# Altium PCB PCB.PcbDoc (part 1 of 2)
Units mil, origin at the board's own origin, x right, y up, seen from the top; angles counter-clockwise.
Board outline 3935 x 3935 mil, 2 copper layers (Top Layer, Bottom Layer); 188 components, 185 nets, 566 pads, 164 vias.
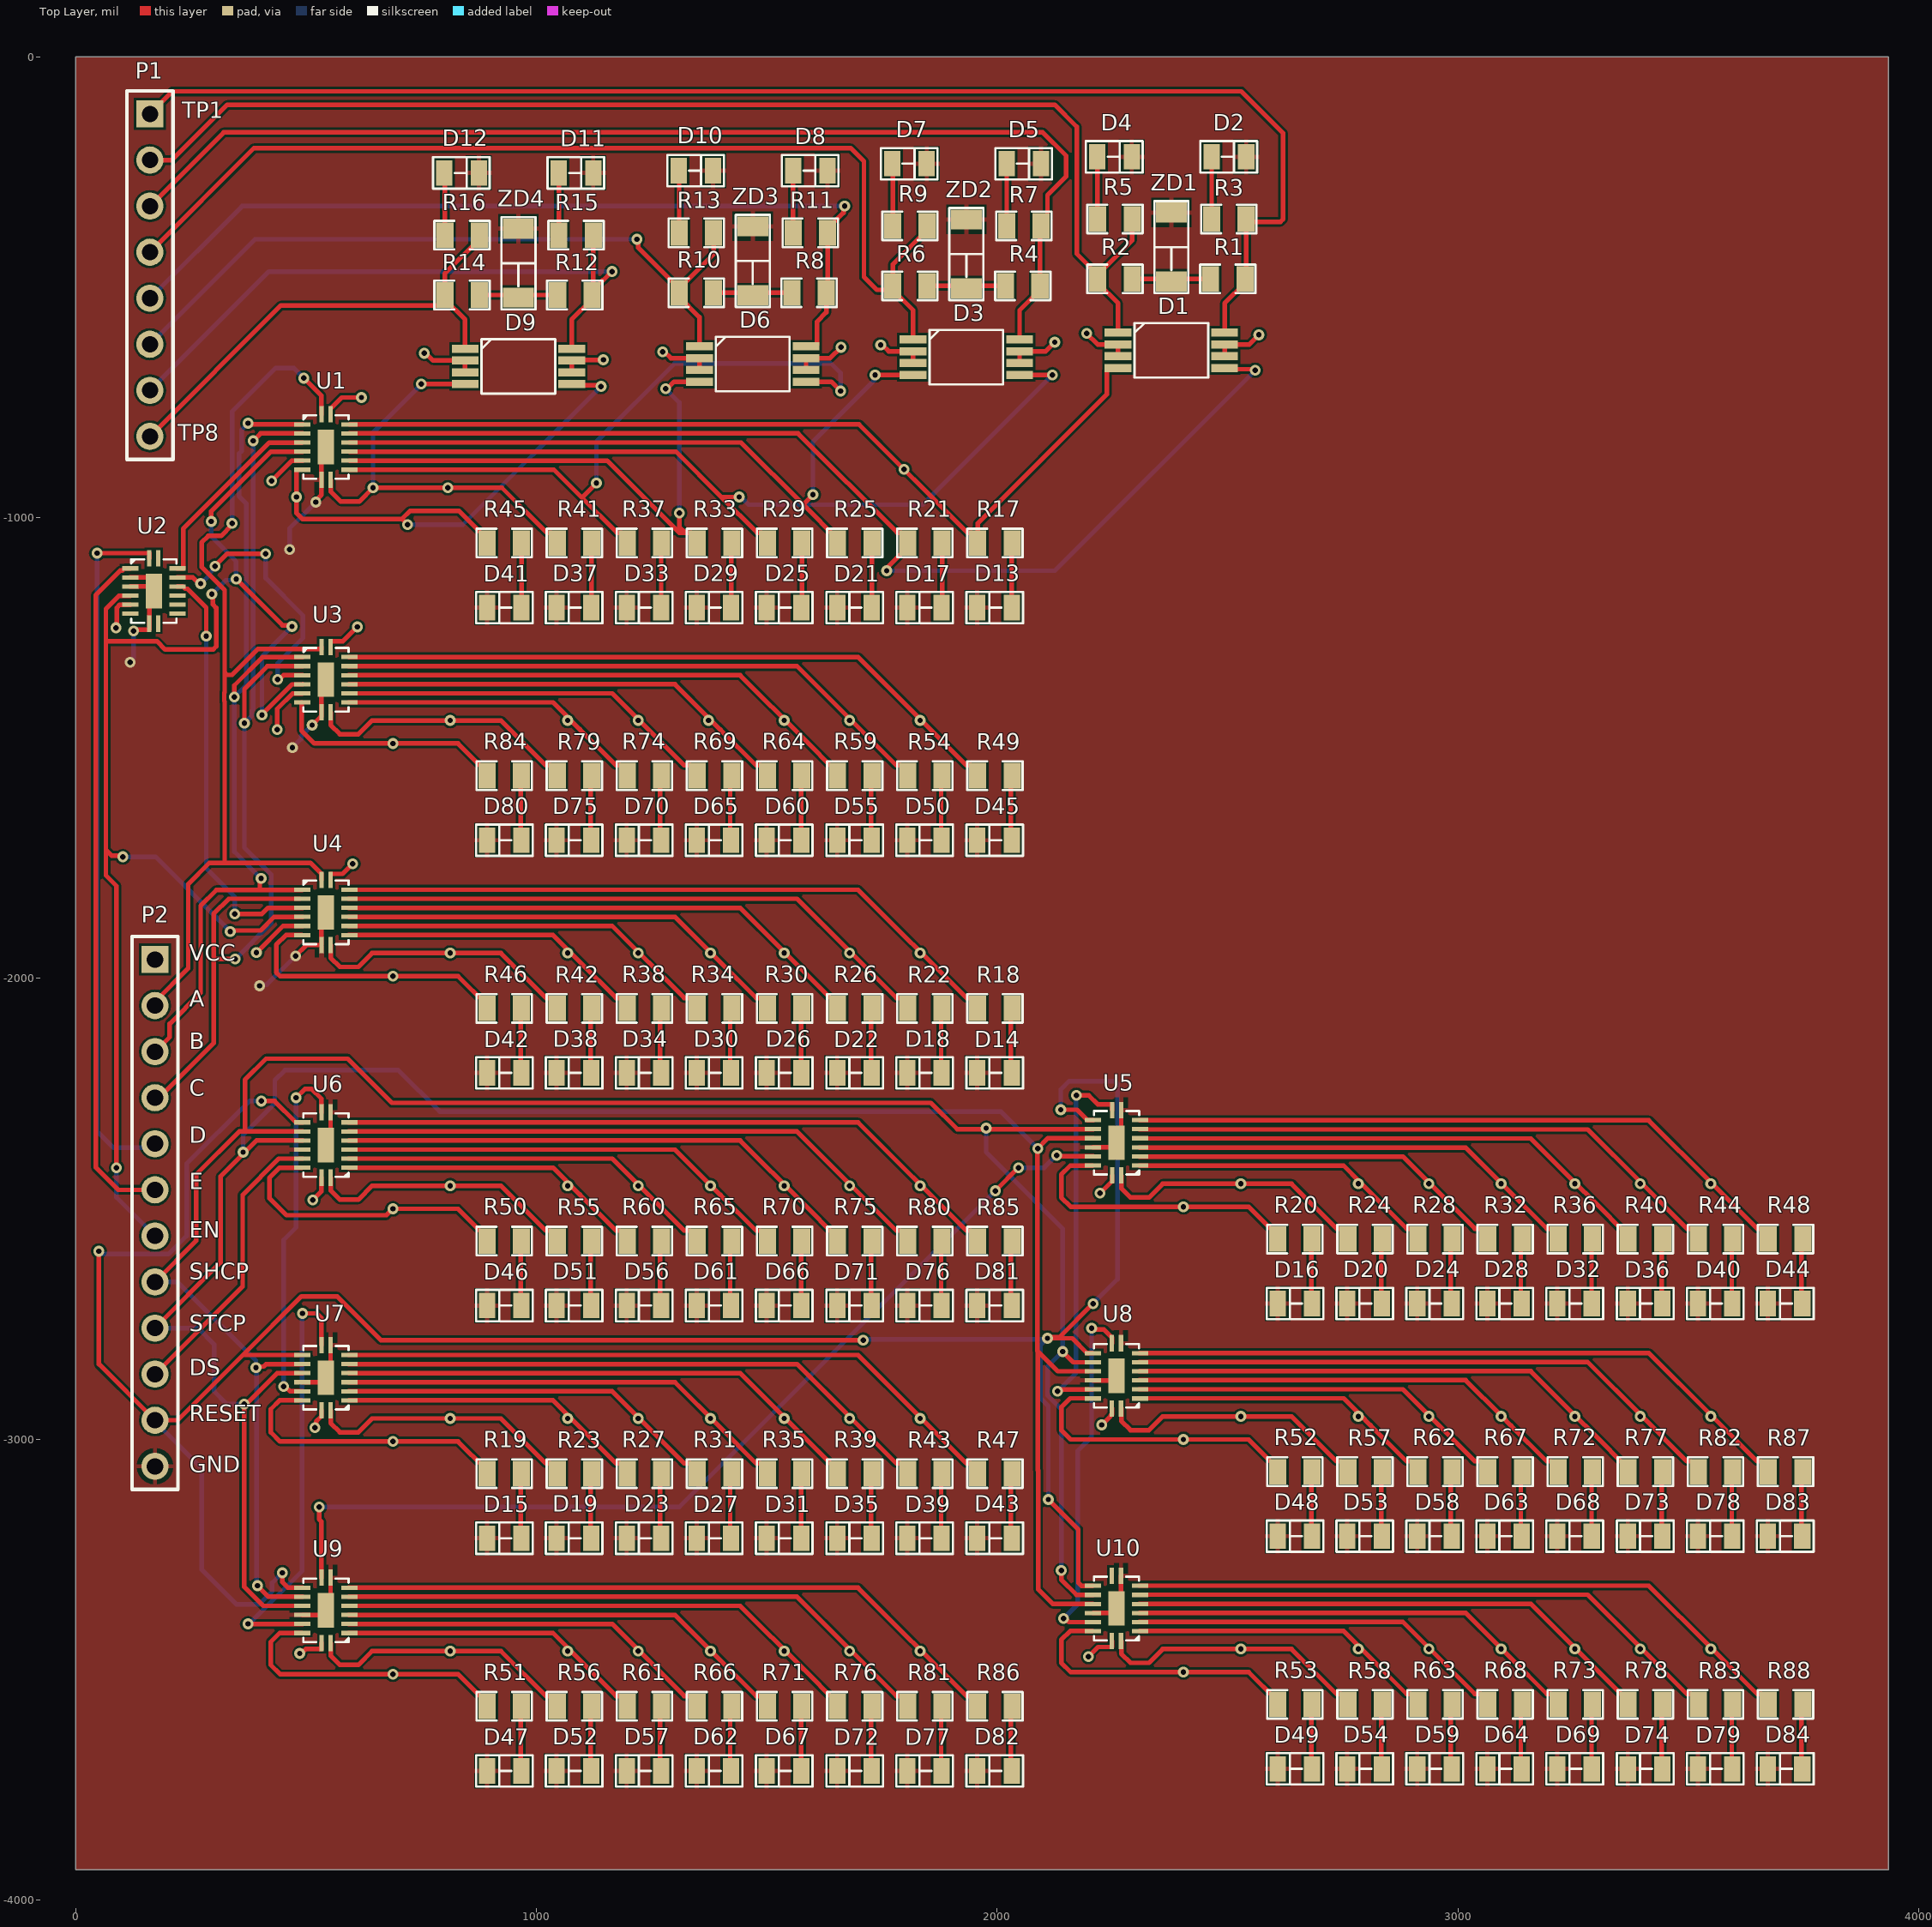
[diagram p0: Top Layer view]
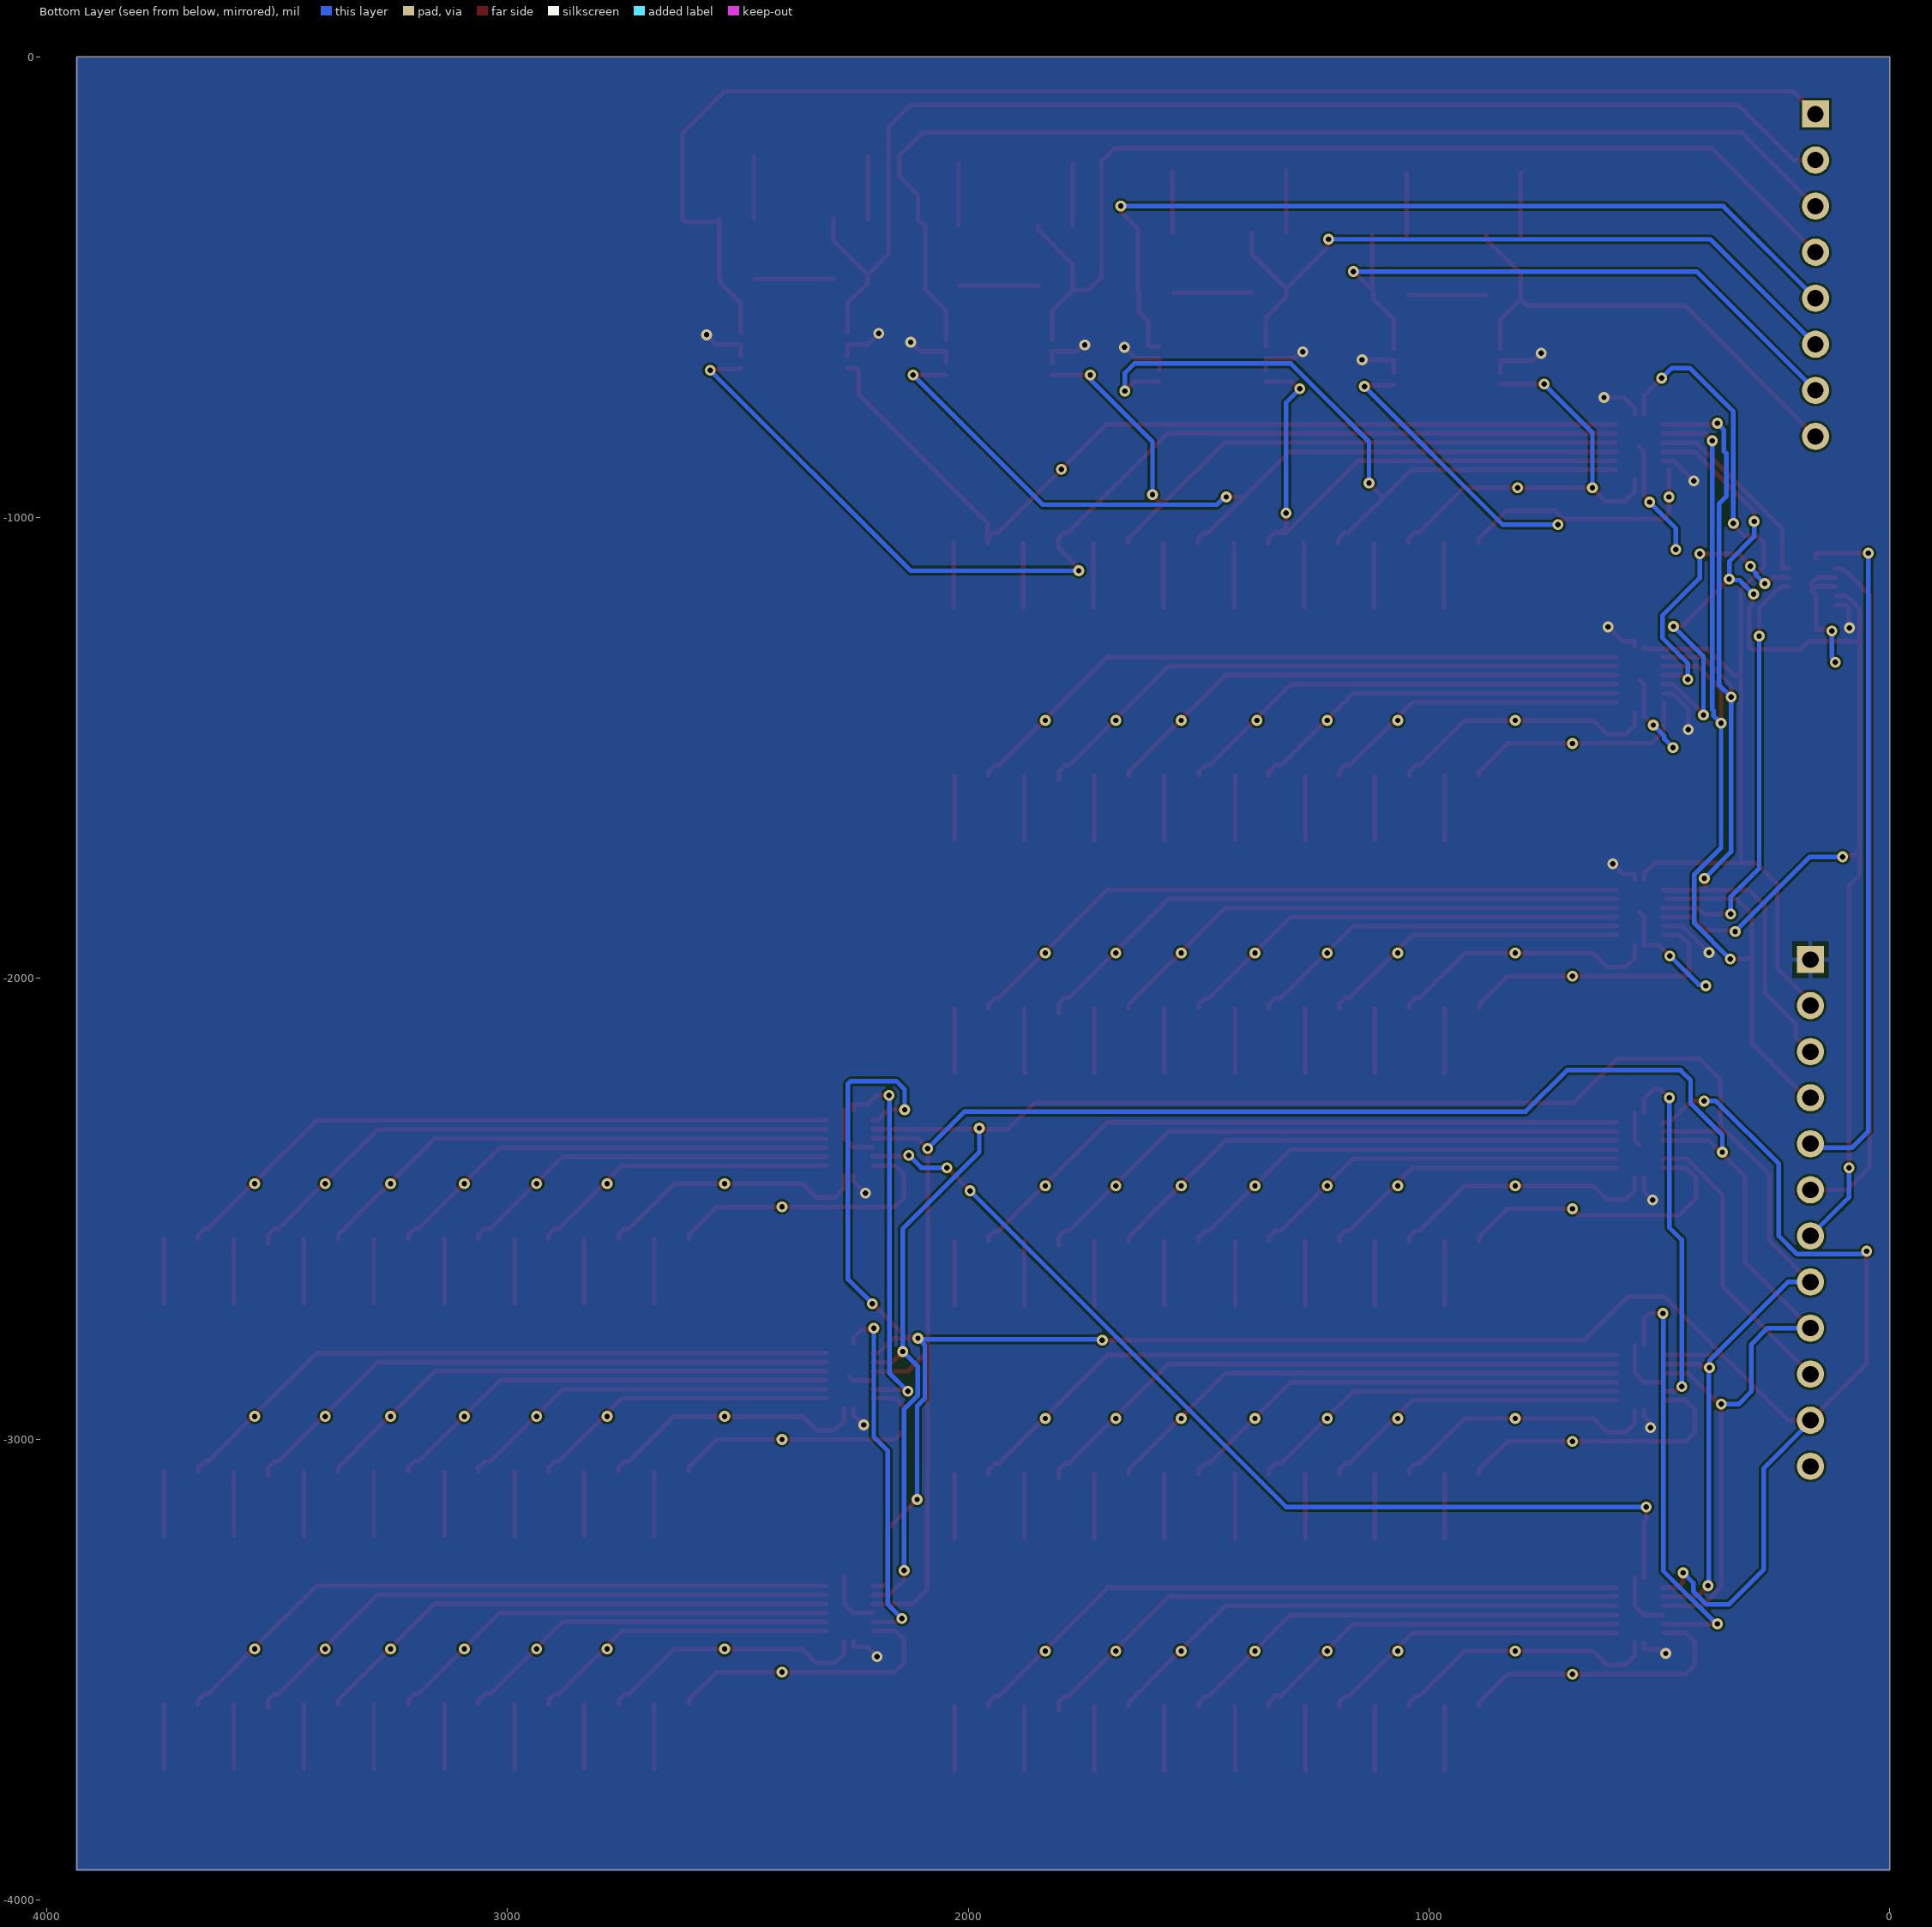
[diagram p1: Bottom Layer view, seen from below]
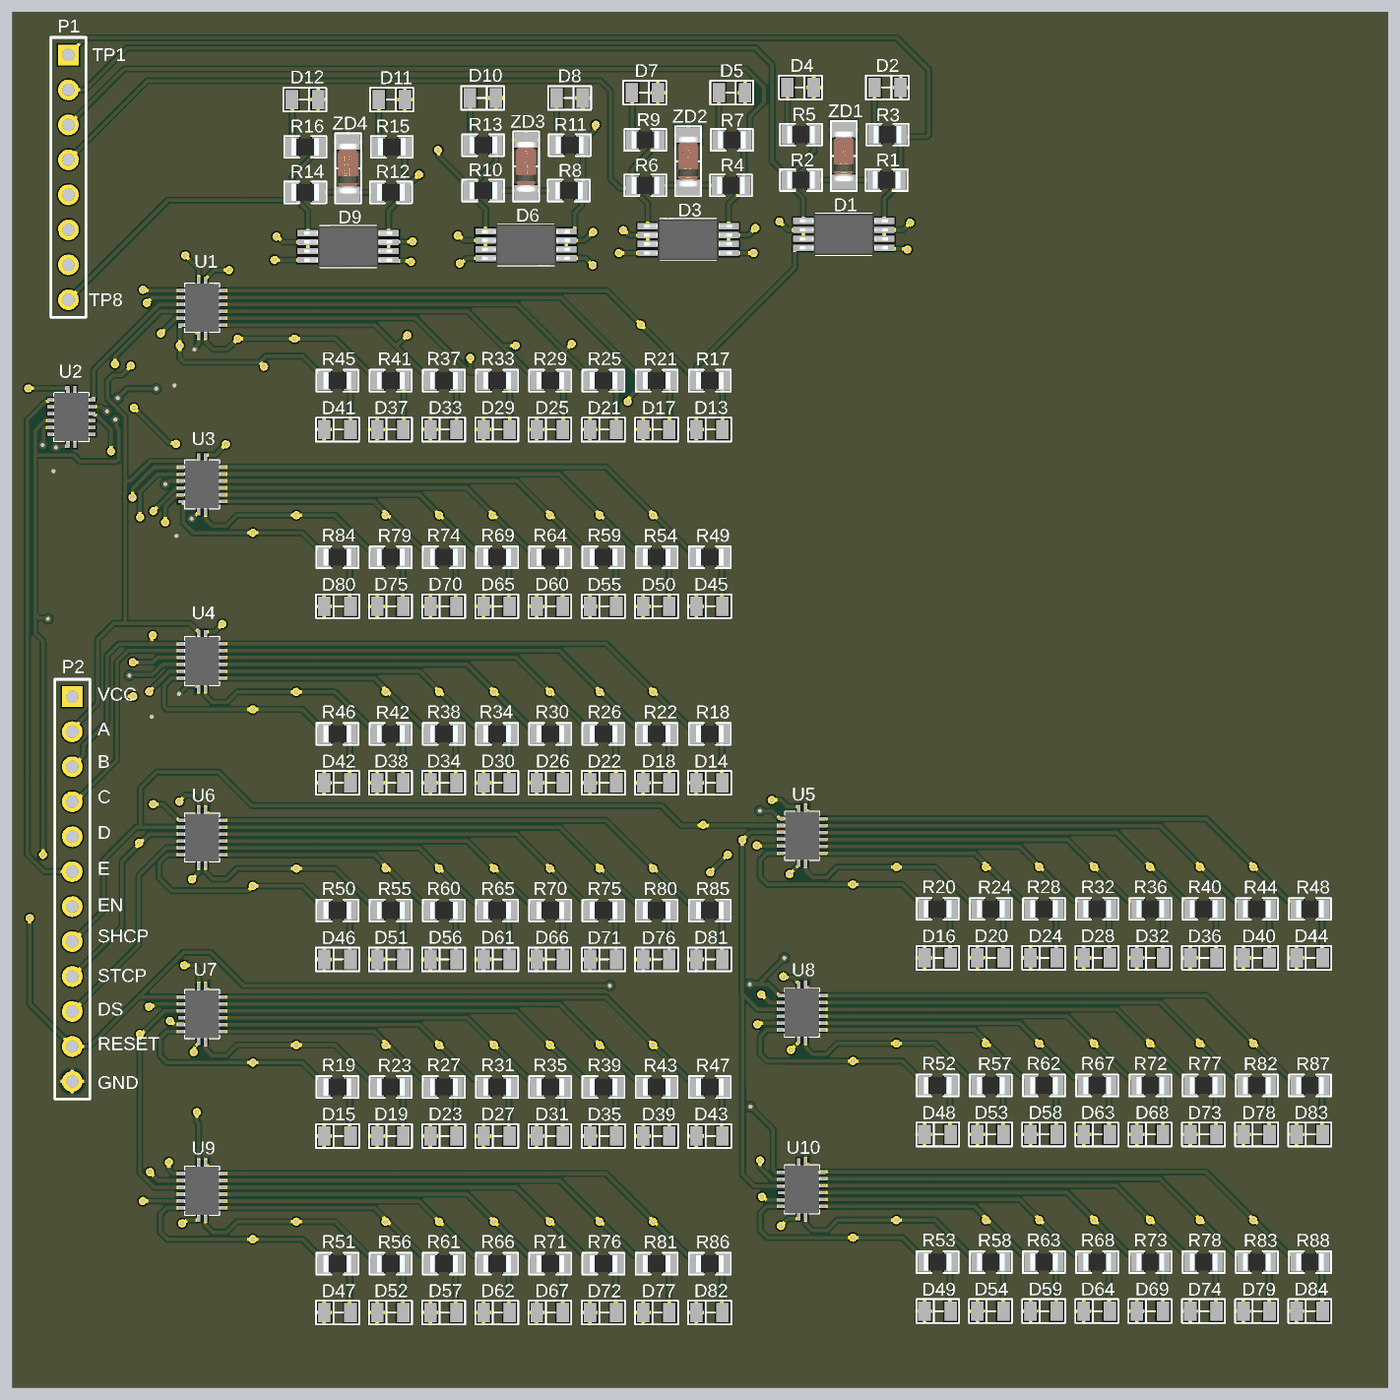
[diagram p3: 3D render of the assembled board from above, using the file's embedded part models]

## Layer stack, top to bottom
Top Solder: solder mask 0.4, Solder Resist, Dk 3.5
Top Layer: signal copper 1.4
Dielectric 1: dielectric 12.6, FR-4, Dk 4.8
Bottom Layer: signal copper 1.4
Bottom Solder: solder mask 0.4, Solder Resist, Dk 3.5

## Board outline
0,-3935 0,0 3935,0 3935,-3935

## Design rules (kind name [scope] priority, off if disabled: settings)
Clearance [All] p1: gap=5 ignorepadtopadclearanceinfootprint=FALSE
MinimumSolderMaskSliver [All] p1: minsoldermaskwidth=0
PolygonConnect [All] p1: thpad.connectstyle=Relief thpad.reliefconductorwidth=10 thpad.reliefentries=4 thpad.polygonreliefangle="90 Angle" thpad.airgapwidth=10 smdpad.connectstyle=Relief smdpad.reliefconductorwidth=10 smdpad.reliefentries=4 smdpad.polygonreliefangle="90 Angle" smdpad.airgapwidth=10 via.connectstyle=Direct via.reliefconductorwidth=10 via.reliefentries=4 via.polygonreliefangle="90 Angle" via.airgapwidth=10
RoutingVias [All] p1: holewidth=11.81 width=23.62 viastyle="Through Hole" minholewidth=1 minwidth=1 maxholewidth=28 maxwidth=50
SilkToSolderMaskClearance [IsPad] p1: minsilkscreentomaskgap=0 clearancetoexposedcopper=TRUE
SolderMaskExpansion [All] p1: expansion=4
Width [All] p1: maxlimit=10 minlimit=10 preferedwidth=10
28 further rules are at their usual default settings.

## Components (designator, comment, footprint, x,y, rotation, side; value= is the part's Value field where it differs from the comment)
D1 "SI6913DQ" "Dual Mosfet" 2377.99,-636.61 r0 top
D2 "0805 LED" "0805 LED" 2502.99,-216.61 r0 top
D3 "SI6913DQ" "Dual Mosfet" 1932.99,-651.61 r0 top
D4 "0805 LED" "0805 LED" 2254.59,-216.61 r0 top
D5 "0805 LED" "0805 LED" 2057.99,-231.61 r0 top
D6 "SI6913DQ" "Dual Mosfet" 1469.33,-666.61 r0 top
D7 "0805 LED" "0805 LED" 1809.59,-231.61 r0 top
D8 "0805 LED" "0805 LED" 1594.33,-246.61 r0 top
D9 "SI6913DQ" "Dual Mosfet" 960.67,-671.61 r0 top
D10 "0805 LED" "0805 LED" 1345.93,-246.61 r0 top
D11 "0805 LED" "0805 LED" 1085.67,-251.61 r0 top
D12 "0805 LED" "0805 LED" 837.27,-251.61 r0 top
D13 "0805 LED" "0805 LED" 1994,-1195 r180 top
D14 "0805 LED" "0805 LED" 1994,-2205 r180 top
D15 "0805 LED" "0805 LED" 930,-3215 r180 top
D16 "0805 LED" "0805 LED" 2646.18,-2705.57 r180 top
D17 "0805 LED" "0805 LED" 1842,-1195 r180 top
D18 "0805 LED" "0805 LED" 1842,-2205 r180 top
D19 "0805 LED" "0805 LED" 1081,-3215 r180 top
D20 "0805 LED" "0805 LED" 2797.18,-2705.57 r180 top
D21 "0805 LED" "0805 LED" 1690,-1195 r180 top
D22 "0805 LED" "0805 LED" 1690,-2205 r180 top
D23 "0805 LED" "0805 LED" 1233,-3215 r180 top
D24 "0805 LED" "0805 LED" 2949.18,-2705.57 r180 top
D25 "0805 LED" "0805 LED" 1537,-1195 r180 top
D26 "0805 LED" "0805 LED" 1537,-2205 r180 top
D27 "0805 LED" "0805 LED" 1385,-3215 r180 top
D28 "0805 LED" "0805 LED" 3101.18,-2705.57 r180 top
D29 "0805 LED" "0805 LED" 1385,-1195 r180 top
D30 "0805 LED" "0805 LED" 1385,-2205 r180 top
D31 "0805 LED" "0805 LED" 1537,-3215 r180 top
D32 "0805 LED" "0805 LED" 3253.18,-2705.57 r180 top
D33 "0805 LED" "0805 LED" 1233,-1195 r180 top
D34 "0805 LED" "0805 LED" 1233,-2205 r180 top
D35 "0805 LED" "0805 LED" 1690,-3215 r180 top
D36 "0805 LED" "0805 LED" 3406.18,-2705.57 r180 top
D37 "0805 LED" "0805 LED" 1081,-1195 r180 top
D38 "0805 LED" "0805 LED" 1081,-2205 r180 top
D39 "0805 LED" "0805 LED" 1842,-3215 r180 top
D40 "0805 LED" "0805 LED" 3558.18,-2705.57 r180 top
D41 "0805 LED" "0805 LED" 930,-1195 r180 top
D42 "0805 LED" "0805 LED" 930,-2205 r180 top
D43 "0805 LED" "0805 LED" 1994,-3215 r180 top
D44 "0805 LED" "0805 LED" 3710.18,-2705.57 r180 top
D45 "0805 LED" "0805 LED" 1994,-1700 r180 top
D46 "0805 LED" "0805 LED" 930,-2710 r180 top
D47 "0805 LED" "0805 LED" 930,-3720 r180 top
D48 "0805 LED" "0805 LED" 2646.18,-3210.57 r180 top
D49 "0805 LED" "0805 LED" 2646.18,-3715.57 r180 top
D50 "0805 LED" "0805 LED" 1842,-1700 r180 top
D51 "0805 LED" "0805 LED" 1081,-2710 r180 top
D52 "0805 LED" "0805 LED" 1081,-3720 r180 top
D53 "0805 LED" "0805 LED" 2797.18,-3210.57 r180 top
D54 "0805 LED" "0805 LED" 2797.18,-3715.57 r180 top
D55 "0805 LED" "0805 LED" 1690,-1700 r180 top
D56 "0805 LED" "0805 LED" 1233,-2710 r180 top
D57 "0805 LED" "0805 LED" 1233,-3720 r180 top
D58 "0805 LED" "0805 LED" 2949.18,-3210.57 r180 top
D59 "0805 LED" "0805 LED" 2949.18,-3715.57 r180 top
D60 "0805 LED" "0805 LED" 1537,-1700 r180 top
D61 "0805 LED" "0805 LED" 1385,-2710 r180 top
D62 "0805 LED" "0805 LED" 1385,-3720 r180 top
D63 "0805 LED" "0805 LED" 3101.18,-3210.57 r180 top
D64 "0805 LED" "0805 LED" 3101.18,-3715.57 r180 top
D65 "0805 LED" "0805 LED" 1385,-1700 r180 top
D66 "0805 LED" "0805 LED" 1537,-2710 r180 top
D67 "0805 LED" "0805 LED" 1537,-3720 r180 top
D68 "0805 LED" "0805 LED" 3253.18,-3210.57 r180 top
D69 "0805 LED" "0805 LED" 3253.18,-3715.57 r180 top
D70 "0805 LED" "0805 LED" 1233,-1700 r180 top
D71 "0805 LED" "0805 LED" 1690,-2710 r180 top
D72 "0805 LED" "0805 LED" 1690,-3720 r180 top
D73 "0805 LED" "0805 LED" 3406.18,-3210.57 r180 top
D74 "0805 LED" "0805 LED" 3406.18,-3715.57 r180 top
D75 "0805 LED" "0805 LED" 1081,-1700 r180 top
D76 "0805 LED" "0805 LED" 1842,-2710 r180 top
D77 "0805 LED" "0805 LED" 1842,-3720 r180 top
D78 "0805 LED" "0805 LED" 3558.18,-3210.57 r180 top
D79 "0805 LED" "0805 LED" 3558.18,-3715.57 r180 top
D80 "0805 LED" "0805 LED" 930,-1700 r180 top
D81 "0805 LED" "0805 LED" 1994,-2710 r180 top
D82 "0805 LED" "0805 LED" 1994,-3720 r180 top
D83 "0805 LED" "0805 LED" 3710.18,-3210.57 r180 top
D84 "0805 LED" "0805 LED" 3710.18,-3715.57 r180 top
P1 "Outputs" HDR1X8 160.78,-123.57 r270 top
P2 "Header 12" HDR1X12 171.78,-1958.9 r270 top
R1 "100R" "0805 Resistor" 2500.39,-481.61 r180 top
R2 "100R" "0805 Resistor" 2255.59,-481.61 r0 top
R3 "330R" "0805 Resistor" 2502.99,-351.61 r0 top
R4 "100R" "0805 Resistor" 2055.39,-496.61 r180 top
R5 "330R" "0805 Resistor" 2255.59,-351.61 r0 top
R6 "100R" "0805 Resistor" 1810.59,-496.61 r0 top
R7 "330R" "0805 Resistor" 2057.99,-366.61 r0 top
R8 "100R" "0805 Resistor" 1591.73,-511.61 r180 top
R9 "330R" "0805 Resistor" 1810.59,-366.61 r0 top
R10 "100R" "0805 Resistor" 1346.93,-511.61 r0 top
R11 "330R" "0805 Resistor" 1594.33,-381.61 r0 top
R12 "100R" "0805 Resistor" 1083.07,-516.61 r180 top
R13 "330R" "0805 Resistor" 1346.93,-381.61 r0 top
R14 "100R" "0805 Resistor" 838.27,-516.61 r0 top
R15 "330R" "0805 Resistor" 1085.67,-386.61 r0 top
R16 "330R" "0805 Resistor" 838.27,-386.61 r0 top
R17 "330R" "0805 Resistor" 1995,-1055 r180 top
R18 "330R" "0805 Resistor" 1995,-2065 r180 top
R19 "330R" "0805 Resistor" 930,-3075 r180 top
R20 "330R" "0805 Resistor" 2646.18,-2565.57 r180 top
R21 "330R" "0805 Resistor" 1842.86,-1055 r180 top
R22 "330R" "0805 Resistor" 1842.86,-2065 r180 top
R23 "330R" "0805 Resistor" 1082.14,-3075 r180 top
R24 "330R" "0805 Resistor" 2798.32,-2565.57 r180 top
R25 "330R" "0805 Resistor" 1690.71,-1055 r180 top
R26 "330R" "0805 Resistor" 1690.71,-2065 r180 top
R27 "330R" "0805 Resistor" 1234.29,-3075 r180 top
R28 "330R" "0805 Resistor" 2950.47,-2565.57 r180 top
R29 "330R" "0805 Resistor" 1538.57,-1055 r180 top
R30 "330R" "0805 Resistor" 1538.57,-2065 r180 top
R31 "330R" "0805 Resistor" 1386.43,-3075 r180 top
R32 "330R" "0805 Resistor" 3102.61,-2565.57 r180 top
R33 "330R" "0805 Resistor" 1386.43,-1055 r180 top
R34 "330R" "0805 Resistor" 1386.43,-2065 r180 top
R35 "330R" "0805 Resistor" 1538.57,-3075 r180 top
R36 "330R" "0805 Resistor" 3254.75,-2565.57 r180 top
R37 "330R" "0805 Resistor" 1234.29,-1055 r180 top
R38 "330R" "0805 Resistor" 1234.28,-2065 r180 top
R39 "330R" "0805 Resistor" 1690.71,-3075 r180 top
R40 "330R" "0805 Resistor" 3406.89,-2565.57 r180 top
R41 "330R" "0805 Resistor" 1082.14,-1055 r180 top
R42 "330R" "0805 Resistor" 1082.14,-2065 r180 top
R43 "330R" "0805 Resistor" 1842.86,-3075 r180 top
R44 "330R" "0805 Resistor" 3559.04,-2565.57 r180 top
R45 "330R" "0805 Resistor" 930,-1055 r180 top
R46 "330R" "0805 Resistor" 930,-2065 r180 top
R47 "330R" "0805 Resistor" 1995,-3075 r180 top
R48 "330R" "0805 Resistor" 3711.18,-2565.57 r180 top
R49 "330R" "0805 Resistor" 1995,-1560 r180 top
R50 "330R" "0805 Resistor" 930,-2570 r180 top
R51 "330R" "0805 Resistor" 930,-3580 r180 top
R52 "330R" "0805 Resistor" 2646.18,-3070.57 r180 top
R53 "330R" "0805 Resistor" 2646.18,-3575.57 r180 top
R54 "330R" "0805 Resistor" 1842.86,-1560 r180 top
R55 "330R" "0805 Resistor" 1082.14,-2570 r180 top
R56 "330R" "0805 Resistor" 1082.14,-3580 r180 top
R57 "330R" "0805 Resistor" 2798.32,-3070.57 r180 top
R58 "330R" "0805 Resistor" 2798.32,-3575.57 r180 top
R59 "330R" "0805 Resistor" 1690.71,-1560 r180 top
R60 "330R" "0805 Resistor" 1234.29,-2570 r180 top
R61 "330R" "0805 Resistor" 1234.29,-3580 r180 top
R62 "330R" "0805 Resistor" 2950.47,-3070.57 r180 top
R63 "330R" "0805 Resistor" 2950.47,-3575.57 r180 top
R64 "330R" "0805 Resistor" 1538.57,-1560 r180 top
R65 "330R" "0805 Resistor" 1386.43,-2570 r180 top
R66 "330R" "0805 Resistor" 1386.43,-3580 r180 top
R67 "330R" "0805 Resistor" 3102.61,-3070.57 r180 top
R68 "330R" "0805 Resistor" 3102.61,-3575.57 r180 top
R69 "330R" "0805 Resistor" 1386.43,-1560 r180 top
R70 "330R" "0805 Resistor" 1538.57,-2570 r180 top
R71 "330R" "0805 Resistor" 1538.57,-3580 r180 top
R72 "330R" "0805 Resistor" 3254.75,-3070.57 r180 top
R73 "330R" "0805 Resistor" 3254.75,-3575.57 r180 top
R74 "330R" "0805 Resistor" 1234.29,-1560 r180 top
R75 "330R" "0805 Resistor" 1690.71,-2570 r180 top
R76 "330R" "0805 Resistor" 1690.71,-3580 r180 top
R77 "330R" "0805 Resistor" 3406.89,-3070.57 r180 top
R78 "330R" "0805 Resistor" 3406.89,-3575.57 r180 top
R79 "330R" "0805 Resistor" 1082.14,-1560 r180 top
R80 "330R" "0805 Resistor" 1842.86,-2570 r180 top
R81 "330R" "0805 Resistor" 1842.86,-3580 r180 top
R82 "330R" "0805 Resistor" 3559.04,-3070.57 r180 top
R83 "330R" "0805 Resistor" 3559.04,-3575.57 r180 top
R84 "330R" "0805 Resistor" 930,-1560 r180 top
R85 "330R" "0805 Resistor" 1995,-2570 r180 top
R86 "330R" "0805 Resistor" 1995,-3580 r180 top
R87 "330R" "0805 Resistor" 3711.18,-3070.57 r180 top
R88 "330R" "0805 Resistor" 3711.18,-3575.57 r180 top
U1 "74HC138" 74HC595 542.99,-846.61 r270 top
U2 "74HC138" 74HC595 169.17,-1159.11 r270 top
U3 "74HC138" 74HC595 542.99,-1351.61 r270 top
U4 "74HC138" 74HC595 542.99,-1856.61 r270 top
U5 "74HC595" 74HC595 2259.17,-2356.61 r90 top
U6 "74HC595" 74HC595 542.99,-2361.61 r90 top
U7 "74HC595" 74HC595 542.99,-2866.61 r90 top
U8 "74HC595" 74HC595 2258.78,-2862.57 r90 top
U9 "74HC595" 74HC595 542.99,-3371.61 r90 top
U10 "74HC595" 74HC595 2258.78,-3367.57 r90 top
ZD1 "3V" "Zener Diode" 2377.99,-337.61 r90 top
ZD2 "3V" "Zener Diode" 1932.99,-352.61 r90 top
ZD3 "3V" "Zener Diode" 1469.33,-367.61 r90 top
ZD4 "3V" "Zener Diode" 960.67,-372.61 r90 top

## Footprints (in the part's own frame and the unit in brackets; to place one, negate y for a bottom-side part, rotate by r counter-clockwise, add the part's x,y. Pads: shape width x height; smd on the part's side, far side on the other; paste and mask are expansions set on the pad)
74HC595 [mm]
  rect 0.9x0.24 smd: 1(-1.8,-0.25) 8(1.8,-0.25) 9(1.8,0.25) 16(-1.8,0.25)
  rect 0.24x0.9 smd: 2(-1.25,-1.3) 3(-0.75,-1.3) 4(-0.25,-1.3) 5(0.25,-1.3) 6(0.75,-1.3) 7(1.25,-1.3) 10(1.25,1.3) 11(0.75,1.3) 12(0.25,1.3) 13(-0.25,1.3) 14(-0.75,1.3) 15(-1.25,1.3)
  rect 1.9x0.9 smd: 17(0,0)
  silkscreen extent -1.75,-1.24 1.75,1.24, body extent -1.8,-1.3 1.8,1.3, height 1
"0805 LED" [mm]
  rect 0.9x1.4 smd: 1(0.95,0) 2(-0.95,0)
  silkscreen extent -1.57,-0.86 1.55,0.86, body extent -1.05,-0.68 1.05,0.67, height 0.9
"0805 Resistor" [mm]
  rect 0.95x1.4 smd: 1(-0.95,0) 2(0.95,0)
  silkscreen extent -1.52,-0.79 1.52,0.79, body extent -1,-0.63 1,0.63, height 0.6
"Dual Mosfet" [mm]
  rect 1.475x0.45 smd: 1(-2.938,0.975) 2(-2.938,0.325) 3(-2.938,-0.325) 4(-2.938,-0.975) 5(2.938,-0.975) 6(2.938,-0.325) 7(2.938,0.325) 8(2.938,0.975)
  silkscreen extent -2.03,-1.5 2.03,1.5, body extent -3.2,-1.5 3.2,1.5, height 1.2
HDR1X8 [mm] "Connector; Header; 8 Position"
  rect 1.5x1.5 hole 0.9: 1(0,0)
  round 1.5 hole 0.9: 2(2.54,0) 3(5.08,0) 4(7.62,0) 5(10.16,0) 6(12.7,0) 7(15.24,0) 8(17.78,0)
  silkscreen extent -1.27,-1.27 19.05,1.27
HDR1X12 [mm] "Connector; Header; 12 Position"
  rect 1.5x1.5 hole 0.9: 1(0,0)
  round 1.5 hole 0.9: 2(2.54,0) 3(5.08,0) 4(7.62,0) 5(10.16,0) 6(12.7,0) 7(15.24,0) 8(17.78,0) 9(20.32,0) 10(22.86,0) 11(25.4,0) 12(27.94,0)
  silkscreen extent -1.27,-1.27 29.21,1.27
"Zener Diode" [mm]
  rect 1.1x1.7 smd: 1(-3.8,0) 2(0,0)
  silkscreen extent -4.44,-0.94 0.64,0.94, body extent -3.78,-0.8 -0.08,0.8, height 1.6

## Part data
P1: library part "Header 8", "Header, 8-Pin", LatestRevisionDate=17-Jul-2002, LatestRevisionNote="Re-released for DXP Platform.", Publisher="Altium Limited"
P2: "Header, 12-Pin", LatestRevisionDate=17-Jul-2002, LatestRevisionNote="Re-released for DXP Platform.", Publisher="Altium Limited"
R1 R2 R3 R4 R5 R6 R7 R8 R9 R10 R11 R12 R13 R14 R15 R16 R17 R18 R19 R20 R21 R22 R23 R24 R25 R26 R27 R28 R29 R30 R31 R32 R33 R34 R35 R36 R37 R38 R39 R40 R41 R42 R43 R44 R45 R46 R47 R48 R49 R50 R51 R52 R53 R54 R55 R56 R57 R58 R59 R60 R61 R62 R63 R64 R65 R66 R67 R68 R69 R70 R71 R72 R73 R74 R75 R76 R77 R78 R79 R80 R81 R82 R83 R84 R85 R86 R87 R88: library part "0805 Resistor"
ZD1 ZD2 ZD3 ZD4: library part BZV55-C3V0

## Via types
v1: diameter 23.62, hole 11.81, Top Layer to Bottom Layer, 143 vias
v2: diameter 23.62, hole 11.81, Top Layer to Bottom Layer, tented both sides, 21 vias

## Nets (pads, with @x,y where several pads share a name; then routed paths per layer and width w, separated by ;. In a path a pad name is that pad's centre, name@x,y a point inside that pad or via, vN(x,y) a via of type N, cw(c..) or ccw(c..) an arc to the next point about the centre after c; other vN are vias at no path point)
A: P2.2 U1.1 U3.1 U4.1 | length 2207.2
  Top Layer w10: P2.2@171.78,-2058.9 171.78,-2050.22 244,-1978 244,-1795 290,-1749 323,-1749 ; v1(339,-1012) 339,-1015.69 315.2,-1039.48 287.52,-1039.48 273,-1054 273,-1106.85 323,-1156.85 323,-1336 ; v1(495,-697) 533.15,-735.15 U1.1@533.15,-775.75 ; U4.1@533.15,-1785.75 533.15,-1773.31 508.84,-1749 323,-1749 ; U3.1@533.15,-1280.75 533.15,-1284.91 532.87,-1285.19 394.97,-1285.19 339,-1341.15 328.15,-1341.15 323,-1336 ; 323,-1749 323,-1398.85 322.19,-1398.03 322.19,-1379.97 323,-1379.15 323,-1336
  Bottom Layer w10: v1(339,-1012) 339,-770 434,-675 473,-675 v1(495,-697)
B: P2.3 U1.2 U3.2 U4.2 | length 1983.3
  Top Layer w10: P2.3@171.78,-2167.57 172.21,-2167.14 P2.3@172.21,-2158.47 ; P2.3@171.78,-2158.9 P2.3@172.21,-2158.47 ; v1(344,-1389) 344,-1364 405.6,-1302.4 U3.2@491.81,-1302.4 ; v1(374,-795) 376.4,-797.4 U1.2@491.81,-797.4 ; v1(402,-1783) 399.39,-1785.61 399.39,-1807.61 399,-1808 ; U4.2@491.81,-1807.4 491.54,-1807.68 474.93,-1807.68 474.61,-1808 399,-1808 ; P2.3@172.21,-2158.47 203.5,-2127.18 203.5,-2098.5 271,-2031 271,-1842 305,-1808 399,-1808
  Bottom Layer w10: v1(374,-795) 360,-809 360,-855 354,-861 354,-953 369.81,-968.81 369.81,-1363.19 v1(344,-1389) 344,-1725 v1(402,-1783)
C: P2.4 U1.3 U3.3 U4.3 | length 2239.7
  Top Layer w10: P2.4@171.78,-2267.57 P2.4@180.45,-2258.9 ; P2.4@171.78,-2258.9 P2.4@180.45,-2258.9 ; v1(346,-1958) 300,-1958 299,-1959 ; v1(365.86,-1446) 365.86,-1372.14 415.64,-1322.36 491.54,-1322.36 U3.3@491.81,-1322.09 ; v1(385,-833) 400.91,-817.09 U1.3@491.81,-817.09 ; U4.3@485.59,-1827.09 331.91,-1827.09 299,-1860 299,-1959 ; P2.4@180.45,-2258.9 299,-2140.35 299,-1959
  Bottom Layer w10: v1(346,-1958) 423.81,-1880.19 423.81,-1773.97 365.86,-1716.01 v1(365.86,-1446) 382.19,-1429.67 382.19,-1418.97 384.81,-1416.34 384.81,-833.19 v1(385,-833)
D: P2.5 U2.1 | length 1519.7
  Top Layer w10: v1(46,-1077) 159.06,-1077 159.33,-1077.28 U2.1@159.33,-1088.25
  Bottom Layer w10: v1(46,-1077) 46,-2331.57 82,-2367.57 P2.5@171.78,-2367.57
DS: P2.10 U6.14 | length 630.3
  Top Layer w10: P2.10@171.78,-2858.9 362,-2668.68 362,-2469.82 440.68,-2391.14 U6.14@491.81,-2391.14
E: P2.6 U2.2 | length 1490.1
  Top Layer w10: U2.2@117.99,-1109.9 105.55,-1109.9 100.59,-1114.86 96.13,-1114.86 43,-1168 43,-2410 91.9,-2458.9 P2.6@171.78,-2458.9
EN: P2.7 U1.5 U2.5 U3.5 U4.5 | length 3336.4
  Top Layer w10: v1(88,-2411) 88,-1799.16 65.19,-1776.35 65.19,-1721 ; v2(102,-1736) 99.39,-1733.39 77.58,-1733.39 65.19,-1721 ; U2.5@117.99,-1168.96 117.72,-1169.23 93.77,-1169.23 65.19,-1197.81 65.19,-1268 ; v1(294,-1008) 294,-986 423.54,-856.46 U1.5@491.81,-856.46 ; v2(295,-1166) 297.61,-1168.61 297.61,-1188.41 304.81,-1195.62 304.81,-1279.33 298.14,-1286 193.59,-1286 175.59,-1268 65.19,-1268 ; v2(335,-1898) 337,-1896 401,-1896 430.54,-1866.46 U4.5@491.81,-1866.46 ; v1(348,-1133) 448.39,-1233.39 466.39,-1233.39 v1(469,-1236) ; v1(404,-1428) 404,-1426.79 469.05,-1361.73 491.54,-1361.73 U3.5@491.81,-1361.46 ; 65.19,-1721 65.19,-1268
  Bottom Layer w10: v1(88,-2411) 88,-2475.12 P2.7@171.78,-2558.9 ; v2(102,-1736) 173,-1736 v2(335,-1898) ; v1(294,-1008) 294,-1041 348,-1095 v1(348,-1133) 345.39,-1135.61 325.39,-1135.61 v2(295,-1166) ; v1(404,-1428) 404,-1301 v1(469,-1236)
GND: D2.1 D4.1 D5.1 D7.1 D8.1 D10.1 D11.1 D12.1 D13.1 D14.1 D15.1 D16.1 D17.1 D18.1 D19.1 D20.1 D21.1 D22.1 D23.1 D24.1 D25.1 D26.1 D27.1 D28.1 D29.1 D30.1 D31.1 D32.1 D33.1 D34.1 D35.1 D36.1 D37.1 D38.1 D39.1 D40.1 D41.1 D42.1 D43.1 D44.1 D45.1 D46.1 D47.1 D48.1 D49.1 D50.1 D51.1 D52.1 D53.1 D54.1 D55.1 D56.1 D57.1 D58.1 D59.1 D60.1 D61.1 D62.1 D63.1 D64.1 D65.1 D66.1 D67.1 D68.1 D69.1 D70.1 D71.1 D72.1 D73.1 D74.1 D75.1 D76.1 D77.1 D78.1 D79.1 D80.1 D81.1 D82.1 D83.1 D84.1 P2.12 U1.8 U1.17 U2.3 U2.4 U2.8 U2.17 U3.8 U3.17 U4.8 U4.17 U5.8 U5.13 U5.17 U6.8 U6.13 U6.17 U7.8 U7.13 U7.17 U8.8 U8.13 U8.17 U9.8 U9.13 U9.17 U10.8 U10.13 U10.17 ZD1.2 ZD2.2 ZD3.2 ZD4.2 | length 1652.6
  Top Layer w10: U2.4@117.99,-1149.27 159.33,-1149.27 U2.17@169.17,-1159.11 ; U2.3@117.99,-1129.59 156.46,-1129.59 169.17,-1142.3 U2.17@169.17,-1159.11 ; v2(125,-1246) 128.69,-1246 131.99,-1242.7 159.06,-1242.7 159.33,-1242.42 U2.8@159.33,-1229.98 159.33,-1168.96 U2.17@169.17,-1159.11 ; v2(477,-1951) 500.52,-1927.48 U4.8@533.15,-1927.48 533.15,-1866.46 U4.17@542.99,-1856.61 ; U9.13@491.81,-3381.46 533.15,-3381.46 U9.17@542.99,-3371.61 552.83,-3361.77 U9.8@552.83,-3300.75 ; U7.13@491.81,-2876.46 533.15,-2876.46 U7.17@542.99,-2866.61 552.83,-2856.77 U7.8@552.83,-2795.75 ; v2(513,-1450) 531.96,-1431.04 532.87,-1431.04 533.15,-1430.77 U3.8@533.15,-1422.48 533.15,-1361.46 U3.17@542.99,-1351.61 ; v2(521,-966) 521,-962.31 533.12,-950.2 U1.8@533.12,-917.51 ; U1.8@533.15,-917.48 533.15,-856.46 U1.17@542.99,-846.61 ; U6.17@542.99,-2361.61 552.83,-2351.77 U6.8@552.83,-2290.75 ; U10.13@2207.6,-3377.41 2248.94,-3377.41 U10.17@2258.78,-3367.57 2268.62,-3357.73 U10.8@2268.62,-3296.71 ; U8.13@2207.6,-2872.41 2248.94,-2872.41 U8.17@2258.78,-2862.57 ; U5.13@2207.99,-2366.46 2249.33,-2366.46 U5.17@2259.17,-2356.61 2269.02,-2346.77 U5.8@2269.02,-2285.75
  Bottom Layer w10: v2(118,-1314) 118,-1310.31 125,-1303.31 v2(125,-1246) ; v2(399,-2016) 401.61,-2013.39 414.61,-2013.39 v2(477,-1951) ; v2(464,-1069) 464,-1023 v2(521,-966) ; v2(470,-1499) 488.96,-1480.04 488.96,-1474.04 v2(513,-1450)
NetD2_2: D2.2 R3.1 | length 135
  Top Layer w10: R3.1@2465.59,-351.61 D2.2@2465.59,-216.61
NetD4_2: D4.2 R5.1 | length 135.4
  Top Layer w10: D4.2@2217.19,-216.61 2217.19,-350.61 R5.1@2218.19,-351.61
NetD5_2: D5.2 R7.1 | length 135
  Top Layer w10: R7.1@2020.59,-366.61 D5.2@2020.59,-231.61
NetD7_2: D7.2 R9.1 | length 135.4
  Top Layer w10: D7.2@1772.19,-231.61 1773.19,-232.61 R9.1@1773.19,-366.61
NetD8_2: D8.2 R11.1 | length 135
  Top Layer w10: R11.1@1556.93,-381.61 D8.2@1556.93,-246.61
NetD10_2: D10.2 R13.1 | length 135.4
  Top Layer w10: D10.2@1308.53,-246.61 1309.53,-247.61 R13.1@1309.53,-381.61
NetD11_2: D11.2 R15.1 | length 135
  Top Layer w10: R15.1@1048.27,-386.61 D11.2@1048.27,-251.61
NetD12_2: D12.2 R16.1 | length 135.4
  Top Layer w10: D12.2@799.87,-251.61 800.87,-252.61 R16.1@800.87,-386.61
NetD13_2: D13.2 R17.1 | length 140.4
  Top Layer w10: D13.2@2031.4,-1195 2031.4,-1056 R17.1@2032.4,-1055
NetD14_2: D14.2 R18.1 | length 140.4
  Top Layer w10: D14.2@2029.43,-2205 2029.43,-2066 R18.1@2030.43,-2065
NetD15_2: D15.2 R19.1 | length 140
  Top Layer w10: D15.2@965.43,-3215 R19.1@965.43,-3075
NetD16_2: D16.2 R20.1 | length 140
  Top Layer w10: D16.2@2681.61,-2705.57 R20.1@2681.61,-2565.57
NetD17_2: D17.2 R21.1 | length 140.4
  Top Layer w10: D17.2@1879.4,-1195 1880.26,-1194.14 R21.1@1880.26,-1055
NetD18_2: D18.2 R22.1 | length 140.4
  Top Layer w10: D18.2@1877.43,-2205 1878.29,-2204.14 R22.1@1878.29,-2065
NetD19_2: D19.2 R23.1 | length 140.5
  Top Layer w10: D19.2@1116.43,-3215 1117.58,-3213.86 R23.1@1117.58,-3075
NetD20_2: D20.2 R24.1 | length 140.5
  Top Layer w10: D20.2@2832.61,-2705.57 2833.76,-2704.43 R24.1@2833.76,-2565.57
NetD21_2: D21.2 R25.1 | length 140.3
  Top Layer w10: D21.2@1727.4,-1195 1728.12,-1194.29 R25.1@1728.12,-1055
NetD22_2: D22.2 R26.1 | length 140.3
  Top Layer w10: D22.2@1725.43,-2205 1726.15,-2204.29 R26.1@1726.15,-2065
NetD23_2: D23.2 R27.1 | length 140.5
  Top Layer w10: D23.2@1268.43,-3215 1268.43,-3076.29 R27.1@1269.72,-3075
NetD24_2: D24.2 R28.1 | length 140.5
  Top Layer w10: D24.2@2984.61,-2705.57 2984.61,-2566.86 R28.1@2985.9,-2565.57
NetD25_2: D25.2 R29.1 | length 140.7
  Top Layer w10: D25.2@1574.4,-1195 1575.97,-1193.43 R29.1@1575.97,-1055
NetD26_2: D26.2 R30.1 | length 140.7
  Top Layer w10: D26.2@1572.43,-2205 1574,-2203.43 R30.1@1574,-2065
NetD27_2: D27.2 R31.1 | length 140.6
  Top Layer w10: D27.2@1420.43,-3215 1420.43,-3076.43 R31.1@1421.86,-3075
NetD28_2: D28.2 R32.1 | length 140.6
  Top Layer w10: D28.2@3136.61,-2705.57 3136.61,-2567 R32.1@3138.04,-2565.57
NetD29_2: D29.2 R33.1 | length 140.6
  Top Layer w10: D29.2@1422.4,-1195 1422.4,-1056.43 R33.1@1423.83,-1055
NetD30_2: D30.2 R34.1 | length 140.6
  Top Layer w10: D30.2@1420.43,-2205 1420.43,-2066.43 R34.1@1421.86,-2065
NetD31_2: D31.2 R35.1 | length 140.7
  Top Layer w10: D31.2@1572.43,-3215 1574,-3213.43 R35.1@1574,-3075
NetD32_2: D32.2 R36.1 | length 140.7
  Top Layer w10: D32.2@3288.61,-2705.57 3290.19,-2704 R36.1@3290.19,-2565.57
NetD33_2: D33.2 R37.1 | length 140.5
  Top Layer w10: D33.2@1270.4,-1195 1270.4,-1056.29 R37.1@1271.69,-1055
NetD34_2: D34.2 R38.1 | length 140.5
  Top Layer w10: D34.2@1268.43,-2205 1268.43,-2066.29 R38.1@1269.72,-2065
NetD35_2: D35.2 R39.1 | length 140.3
  Top Layer w10: D35.2@1725.43,-3215 1726.15,-3214.29 R39.1@1726.15,-3075
NetD36_2: D36.2 R40.1 | length 140.3
  Top Layer w10: D36.2@3441.61,-2705.57 3442.33,-2704.86 R40.1@3442.33,-2565.57
NetD37_2: D37.2 R41.1 | length 140.5
  Top Layer w10: D37.2@1118.4,-1195 1119.54,-1193.86 R41.1@1119.54,-1055
NetD38_2: D38.2 R42.1 | length 140.5
  Top Layer w10: D38.2@1116.43,-2205 1117.58,-2203.86 R42.1@1117.58,-2065
NetD39_2: D39.2 R43.1 | length 140.4
  Top Layer w10: D39.2@1877.43,-3215 1878.29,-3214.14 R43.1@1878.29,-3075
NetD40_2: D40.2 R44.1 | length 140.4
  Top Layer w10: D40.2@3593.61,-2705.57 3594.47,-2704.71 R44.1@3594.47,-2565.57
NetD41_2: D41.2 R45.1 | length 140
  Top Layer w10: D41.2@967.4,-1195 R45.1@967.4,-1055
NetD42_2: D42.2 R46.1 | length 140
  Top Layer w10: D42.2@965.43,-2205 R46.1@965.43,-2065
NetD43_2: D43.2 R47.1 | length 140.4
  Top Layer w10: D43.2@2029.43,-3215 2029.43,-3076 R47.1@2030.43,-3075
NetD44_2: D44.2 R48.1 | length 140.4
  Top Layer w10: D44.2@3745.61,-2705.57 3745.61,-2566.57 R48.1@3746.61,-2565.57
NetD45_2: D45.2 R49.1 | length 140.4
  Top Layer w10: D45.2@2029.43,-1700 2029.43,-1561 R49.1@2030.43,-1560
NetD46_2: D46.2 R50.1 | length 140
  Top Layer w10: D46.2@965.43,-2710 R50.1@965.43,-2570
NetD47_2: D47.2 R51.1 | length 140
  Top Layer w10: D47.2@965.43,-3720 R51.1@965.43,-3580
NetD48_2: D48.2 R52.1 | length 140
  Top Layer w10: D48.2@2681.61,-3210.57 R52.1@2681.61,-3070.57
NetD49_2: D49.2 R53.1 | length 140
  Top Layer w10: D49.2@2681.61,-3715.57 R53.1@2681.61,-3575.57
NetD50_2: D50.2 R54.1 | length 140.4
  Top Layer w10: D50.2@1877.43,-1700 1878.29,-1699.14 R54.1@1878.29,-1560
NetD51_2: D51.2 R55.1 | length 140.5
  Top Layer w10: D51.2@1116.43,-2710 1117.58,-2708.86 R55.1@1117.58,-2570
NetD52_2: D52.2 R56.1 | length 140.5
  Top Layer w10: D52.2@1116.43,-3720 1117.58,-3718.86 R56.1@1117.58,-3580
NetD53_2: D53.2 R57.1 | length 140.5
  Top Layer w10: D53.2@2832.61,-3210.57 2833.76,-3209.43 R57.1@2833.76,-3070.57
NetD54_2: D54.2 R58.1 | length 140.5
  Top Layer w10: D54.2@2832.61,-3715.57 2833.76,-3714.43 R58.1@2833.76,-3575.57
NetD55_2: D55.2 R59.1 | length 140.3
  Top Layer w10: D55.2@1725.43,-1700 1726.15,-1699.29 R59.1@1726.15,-1560
NetD56_2: D56.2 R60.1 | length 140.5
  Top Layer w10: D56.2@1268.43,-2710 1268.43,-2571.29 R60.1@1269.72,-2570
NetD57_2: D57.2 R61.1 | length 140.5
  Top Layer w10: D57.2@1268.43,-3720 1268.43,-3581.29 R61.1@1269.72,-3580
NetD58_2: D58.2 R62.1 | length 140.5
  Top Layer w10: D58.2@2984.61,-3210.57 2984.61,-3071.86 R62.1@2985.9,-3070.57
NetD59_2: D59.2 R63.1 | length 140.5
  Top Layer w10: D59.2@2984.61,-3715.57 2984.61,-3576.86 R63.1@2985.9,-3575.57
NetD60_2: D60.2 R64.1 | length 140.7
  Top Layer w10: D60.2@1572.43,-1700 1574,-1698.43 R64.1@1574,-1560
NetD61_2: D61.2 R65.1 | length 140.6
  Top Layer w10: D61.2@1420.43,-2710 1420.43,-2571.43 R65.1@1421.86,-2570
NetD62_2: D62.2 R66.1 | length 140.6
  Top Layer w10: D62.2@1420.43,-3720 1420.43,-3581.43 R66.1@1421.86,-3580
NetD63_2: D63.2 R67.1 | length 140.6
  Top Layer w10: D63.2@3136.61,-3210.57 3136.61,-3072 R67.1@3138.04,-3070.57
NetD64_2: D64.2 R68.1 | length 140.6
  Top Layer w10: D64.2@3136.61,-3715.57 3136.61,-3577 R68.1@3138.04,-3575.57
NetD65_2: D65.2 R69.1 | length 140.6
  Top Layer w10: D65.2@1420.43,-1700 1420.43,-1561.43 R69.1@1421.86,-1560
NetD66_2: D66.2 R70.1 | length 140.7
  Top Layer w10: D66.2@1572.43,-2710 1574,-2708.43 R70.1@1574,-2570
NetD67_2: D67.2 R71.1 | length 140.7
  Top Layer w10: D67.2@1572.43,-3720 1574,-3718.43 R71.1@1574,-3580
NetD68_2: D68.2 R72.1 | length 140.7
  Top Layer w10: D68.2@3288.61,-3210.57 3290.19,-3209 R72.1@3290.19,-3070.57
NetD69_2: D69.2 R73.1 | length 140.7
  Top Layer w10: D69.2@3288.61,-3715.57 3290.19,-3714 R73.1@3290.19,-3575.57
NetD70_2: D70.2 R74.1 | length 140.5
  Top Layer w10: D70.2@1268.43,-1700 1268.43,-1561.29 R74.1@1269.72,-1560
NetD71_2: D71.2 R75.1 | length 140.3
  Top Layer w10: D71.2@1725.43,-2710 1726.15,-2709.29 R75.1@1726.15,-2570
NetD72_2: D72.2 R76.1 | length 140.3
  Top Layer w10: D72.2@1725.43,-3720 1726.15,-3719.29 R76.1@1726.15,-3580
NetD73_2: D73.2 R77.1 | length 140.3
  Top Layer w10: D73.2@3441.61,-3210.57 3442.33,-3209.86 R77.1@3442.33,-3070.57
NetD74_2: D74.2 R78.1 | length 140.3
  Top Layer w10: D74.2@3441.61,-3715.57 3442.33,-3714.86 R78.1@3442.33,-3575.57
NetD75_2: D75.2 R79.1 | length 140.5
  Top Layer w10: D75.2@1116.43,-1700 1117.58,-1698.86 R79.1@1117.58,-1560
NetD76_2: D76.2 R80.1 | length 140.4
  Top Layer w10: D76.2@1877.43,-2710 1878.29,-2709.14 R80.1@1878.29,-2570
NetD77_2: D77.2 R81.1 | length 140.4
  Top Layer w10: D77.2@1877.43,-3720 1878.29,-3719.14 R81.1@1878.29,-3580
NetD78_2: D78.2 R82.1 | length 140.4
  Top Layer w10: D78.2@3593.61,-3210.57 3594.47,-3209.71 R82.1@3594.47,-3070.57
NetD79_2: D79.2 R83.1 | length 140.4
  Top Layer w10: D79.2@3593.61,-3715.57 3594.47,-3714.71 R83.1@3594.47,-3575.57
NetD80_2: D80.2 R84.1 | length 140
  Top Layer w10: D80.2@965.43,-1700 R84.1@965.43,-1560
NetD81_2: D81.2 R85.1 | length 140.4
  Top Layer w10: D81.2@2029.43,-2710 2029.43,-2571 R85.1@2030.43,-2570
NetD82_2: D82.2 R86.1 | length 140.4
  Top Layer w10: D82.2@2029.43,-3720 2029.43,-3581 R86.1@2030.43,-3580
NetD83_2: D83.2 R87.1 | length 140.4
  Top Layer w10: D83.2@3745.61,-3210.57 3745.61,-3071.57 R87.1@3746.61,-3070.57
NetD84_2: D84.2 R88.1 | length 140.4
  Top Layer w10: D84.2@3745.61,-3715.57 3745.61,-3576.57 R88.1@3746.61,-3575.57
NetR1_2: R1.2 R2.2 ZD1.1 | length 170
  Top Layer w10: R2.2@2292.99,-481.61 R1.2@2462.99,-481.61
NetR4_2: R4.2 R6.2 ZD2.1 | length 170
  Top Layer w10: R6.2@1847.99,-496.61 R4.2@2017.99,-496.61
NetR8_2: R8.2 R10.2 ZD3.1 | length 170
  Top Layer w10: R10.2@1384.33,-511.61 R8.2@1554.33,-511.61
NetR12_2: R12.2 R14.2 ZD4.1 | length 170
  Top Layer w10: R14.2@875.67,-516.61 R12.2@1045.67,-516.61
OUT1: D1.4 R17.2 U1.15 | length 1984.5
  Top Layer w10: U1.15@594.17,-797.4 1700,-797.4 1935.04,-1032.44 1943.9,-1032.44 R17.2@1957.6,-1046.14 ; R17.2@1957.6,-1055 R17.2@1957.6,-1046.14 ; D1.4@2262.32,-675 2242.15,-675 2238.29,-678.86 2238.29,-731.75 1957.6,-1012.44 R17.2@1957.6,-1046.14
  other v1: 1797.6,-895
OUT1-8: U1.4 U2.15 | length 434.8
  Top Layer w10: U2.15@220.35,-1109.9 232.8,-1109.9 233.07,-1109.63 233.07,-1023.93 419.95,-837.05 491.54,-837.05 U1.4@491.81,-836.77
OUT2: D1.5 R21.2 U1.14 | length 2442.4
  Top Layer w10: U1.14@594.17,-817.09 1567.54,-817.09 1782.9,-1032.44 1791.75,-1032.44 1805.46,-1046.14 R21.2@1805.46,-1055 1805.46,-1063.86 1762.61,-1106.71 1762.61,-1112.39 v1(1760,-1115) ; D1.5@2493.66,-675 2496.16,-677.5 2557.5,-677.5 v1(2560,-680)
  Bottom Layer w10: v1(1760,-1115) 2125,-1115 v1(2560,-680)